# EAGLE board AmbaSat-1 version 2.0 (EAGLE 7.6.0)
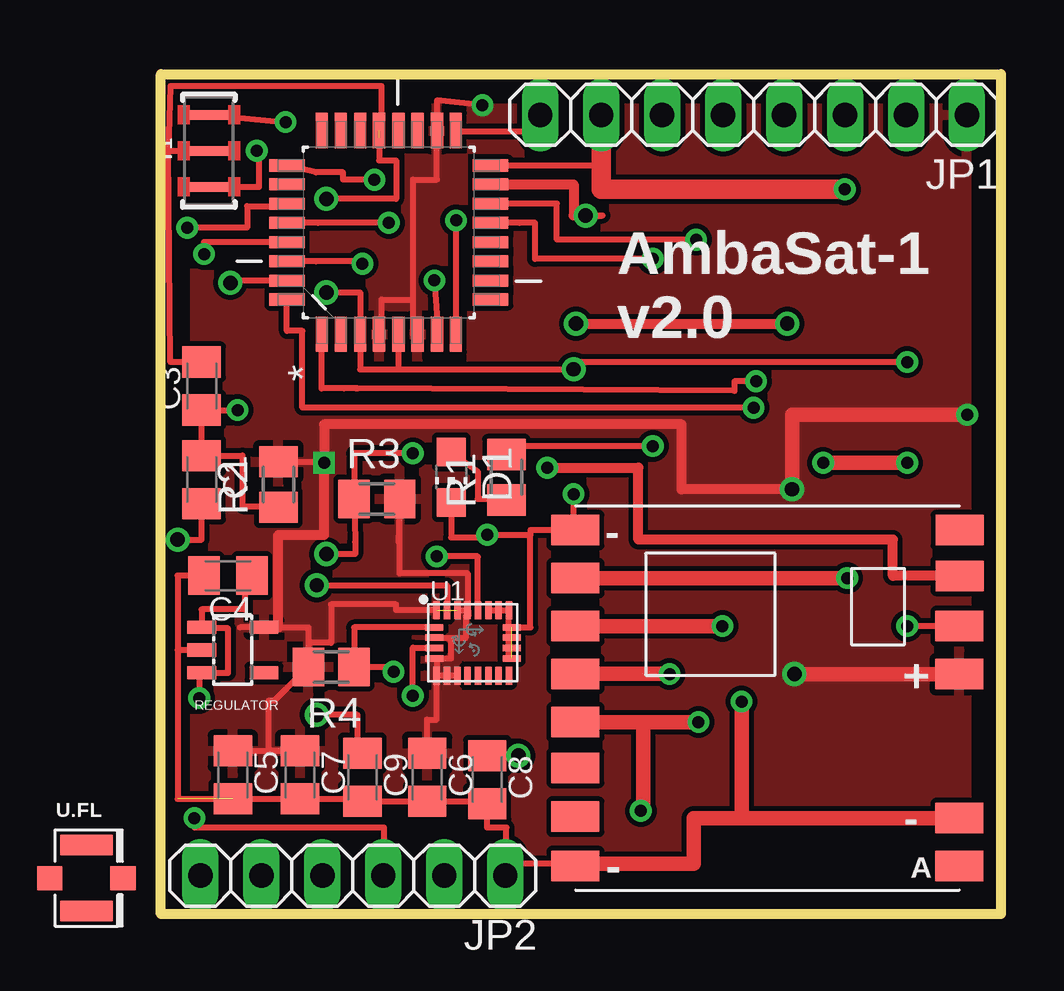
[diagram p0: board, top side]
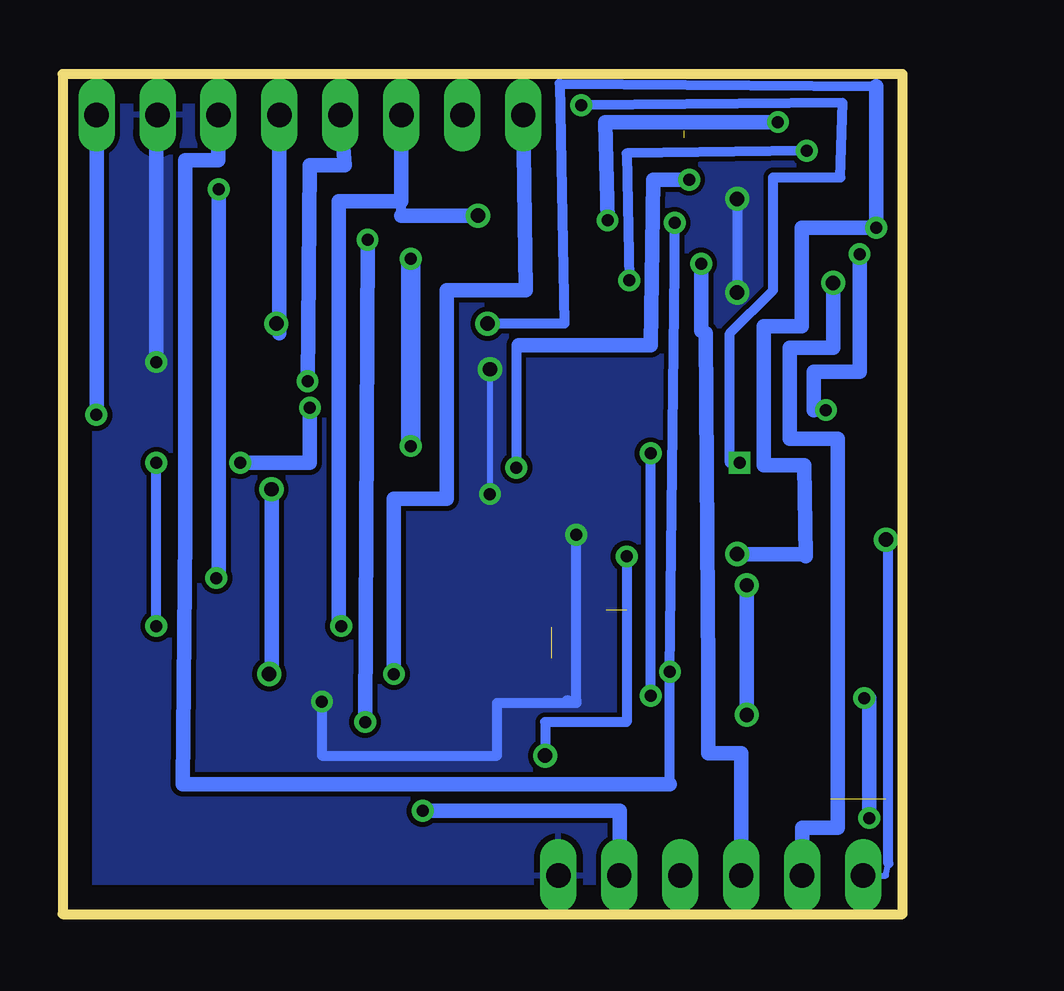
[diagram p1: board, bottom side, seen from below]

Size 35 x 35 mm. Coordinates in mm from the lower left corner, seen from the top.
Outline: 0,0 0,35 35,35 35,0 0,0
Copper layers (1*16): Top 0.035mm / dielectric 1.5mm / Bottom 0.035mm
Design rules "default": minimum track width 10mil, minimum drill 24mil, track to track 8mil, track to pad 8mil, pad to pad 8mil, via to via 8mil, smd to smd 8mil, copper to edge 40mil, drill to drill 8mil, minimum pad ring 10mil, minimum via ring 8mil, stop-mask expansion 4mil, vias tented up to drill 0mil, thermal gap 10mil

## Footprints (pad centres in the part's own frame; a part is rotated, then mirrored left to right if it is on the bottom)
QFP80P900X900X120-32N = smd 1.473 x 0.508: 1 -4.242,2.794; 2 -4.242,2.007; 3 -4.242,1.194; 4 -4.242,0.406; 5 -4.242,-0.406; 6 -4.242,-1.194; 7 -4.242,-2.007; 8 -4.242,-2.794; 17 4.242,-2.794; 18 4.242,-2.007; 19 4.242,-1.194; 20 4.242,-0.406; 21 4.242,0.406; 22 4.242,1.194; 23 4.242,2.007; 24 4.242,2.794 | smd 0.508 x 1.473: 9 -2.794,-4.242; 10 -2.007,-4.242; 11 -1.194,-4.242; 12 -0.406,-4.242; 13 0.406,-4.242; 14 1.194,-4.242; 15 2.007,-4.242; 16 2.794,-4.242; 25 2.794,4.242; 26 2.007,4.242; 27 1.194,4.242; 28 0.406,4.242; 29 -0.406,4.242; 30 -1.194,4.242; 31 -2.007,4.242; 32 -2.794,4.242
C0805K = smd 1.3 x 1.6: 1 -1,0; 2 1,0
CHIP-LED0805 = smd 1.2 x 1.2: A 0,-1.05; C 0,1.05
1X08 = drill 1.016 long: 1 -8.89,0; 2 -6.35,0; 3 -3.81,0; 4 -1.27,0; 5 1.27,0; 6 3.81,0; 7 6.35,0; 8 8.89,0
1X06 = drill 1.016 long: 1 -6.35,0; 2 -3.81,0; 3 -1.27,0; 4 1.27,0; 5 3.81,0; 6 6.35,0
M0805 = smd 1.3 x 1.6: 1 -0.95,0; 2 0.95,0
SOT25 = smd 0.55 x 1.2: 1 -0.95,-1.3; 2 0,-1.3; 3 0.95,-1.3; 4 0.95,1.3; 5 -0.95,1.3
RFM95 = smd 2 x 1.27: ANT 5.777,-7; DIO0 5.777,3; DIO1 5.779,5.095; DIO2 5.779,7; DIO5 -10.225,-4.936; GND 5.777,-5; GND1 -10.223,7; GND2 -10.23,-7; MISO -10.23,5; MOSI -10.225,3; NSS -10.223,-1; RST -10.223,-2.905; SCK -10.23,1.012; VDD 5.777,1
LGA24-8X4 = smd 0.27 x 0.75: 1 -1.505,1.365; 6 -1.505,-1.365; 7 -1.075,-1.365; 8 -0.645,-1.365; 9 -0.215,-1.365; 10 0.215,-1.365; 11 0.645,-1.365; 12 1.075,-1.365; 13 1.505,-1.365; 18 1.505,1.365; 19 1.075,1.365; 20 0.645,1.365; 21 0.215,1.365; 22 -0.215,1.365; 23 -0.645,1.365; 24 -1.075,1.365 | smd 0.75 x 0.27: 2 -1.615,0.645; 3 -1.615,0.215; 4 -1.615,-0.215; 5 -1.615,-0.645; 14 1.615,-0.645; 15 1.615,-0.215; 16 1.615,0.215; 17 1.615,0.645
U.FL = smd 2.2 x 0.85: 1 0,1.375; 2 0,-1.375 | smd 1.05 x 1: FEED 1.525,0; NC -1.525,0
RESONATOR-SMD-4.5X2.0 = smd 0.4 x 1.6: 1 -1.5,0; 2 0,0; 3 1.5,0

## Placement (x,y rotation side)
ATMEGA328P-AU  ATMEGA328P-AU  [QFP80P900X900X120-32N]  9.5,28.4 90 top
C1  1uF  [C0805K]  1.7,18.1 270 top
C3  0.1uF  [C0805K]  1.7,22 90 top
C4  1uF  [C0805K]  2.8,14.1 180 top
C5  2.2uF  [C0805K]  3,5.8 270 top
C6  10uF  [C0805K]  11.1,5.7 270 top
C7  0.1uF  [C0805K]  5.8,5.8 270 top
C8  10nF  [C0805K]  13.6,5.6 270 top
C9  0.1uF  [C0805K]  8.4,5.7 270 top
D1  [CHIP-LED0805]  12.1,18.2 180 top
JP1  [1X08]  24.7,33.3 180 top
JP2  [1X06]  8,1.6 180 top
R1  1k6  [M0805]  14.4,18.2 90 top
R2  10k  [M0805]  4.9,17.9 90 top
R3  1K  [M0805]  9,17.3 0 top
R4  1K  [M0805]  7.1,10.3 180 top
REGULATOR  LP2985AIM5-3.3  [SOT25]  3,11 270 top
RFM95  RFM95  [RFM95]  27.5,9 0 top
U1  LSM9DS1  [LGA24-8X4]  13,11.3 0 top
U.FL  U.FL  [U.FL]  -3.1,1.5 0 top
Y1  4MHz  [RESONATOR-SMD-4.5X2.0]  2,31.8 90 top

## Library data of the parts
ATMEGA328P-AU = Atmel-ATMEGA328P-AU; DESCRIPTION: 8-bit Microcontroller with In-System Programmable Flash; MPN: ATMEGA328P-AU; OC_FARNELL: 1715486; OC_NEWARK: 14R4631; PACKAGE: TQFP-32; SUPPLIER: Atmel
C1 C3-C9 R1-R4 = rcl
D1 = led
JP1 JP2 = pinhead
REGULATOR = LP2985
RFM95 = _c2h
U1 = LSM9DS1; PROD_ID: IC-12536
U.FL = SparkFun-Connectors; PROD_ID: CONN-09193; SF_ID: WRL-09144
Y1 = SparkFun-Clocks; PROD_ID: XTAL-12492

## Nets
A0: ATMEGA328P-AU.23
AREF: ATMEGA328P-AU.20
D3: ATMEGA328P-AU.1 JP1.5
DIO0: ATMEGA328P-AU.32 RFM95.DIO0
DIO1: ATMEGA328P-AU.25 RFM95.DIO1
GND: ATMEGA328P-AU.3 ATMEGA328P-AU.5 ATMEGA328P-AU.21 C3.2 C4.2 C5.2 C6.2 C7.2 C8.2 C9.2 D1.C JP1.2 JP2.1 REGULATOR.2 RFM95.GND RFM95.GND1 RFM95.GND2 U1.14 U1.15 U1.16 U1.17 U1.18 U1.19 U1.20 Y1.2
MISO: ATMEGA328P-AU.16 JP1.7 RFM95.MISO
MOSI: ATMEGA328P-AU.15 JP1.6 RFM95.MOSI
N$1: ATMEGA328P-AU.7 Y1.1
N$2: ATMEGA328P-AU.8 Y1.3
N$3: ATMEGA328P-AU.13 R1.2
N$4: D1.A R1.1
N$5: RFM95.ANT
N$6: C1.2 JP2.6
N$7: C9.1 U1.24
N$8: C8.1 U1.21
N$9: U.FL.2
RESET: ATMEGA328P-AU.29 C1.1 C3.1 R2.1
RX: ATMEGA328P-AU.30 JP2.4
SCK: ATMEGA328P-AU.17 JP1.8 RFM95.SCK
SCL: ATMEGA328P-AU.28 JP1.3 R4.1 U1.2
SDA: ATMEGA328P-AU.27 JP1.4 R3.1 U1.4
SS: ATMEGA328P-AU.14 JP2.2 RFM95.NSS
TX: ATMEGA328P-AU.31 JP2.5
VCC: ATMEGA328P-AU.4 ATMEGA328P-AU.6 ATMEGA328P-AU.18 C5.1 C6.1 C7.1 JP1.1 R2.2 R3.2 R4.2 REGULATOR.5 RFM95.VDD U1.1 U1.3 U1.5 U1.6 U1.7 U1.8 U1.22 U1.23
VIN: C4.1 JP2.3 REGULATOR.1 REGULATOR.3

## Tracks (layer width: path | path; a pad name or v marks a point on that pad's centre or on a via)
D3  (via drill 0.5)
  Top 0.254: 8.21,21.9 7.64,21.9 | v24.8,22.2 23.9,22.2 23.9,21.8 8.14,21.9 7.64,21.9 | 7.64,21.9 6.71,21.9 ATMEGA328P-AU.1
  Bottom 0.254: JP1.5 23.44,33.4
  Bottom 0.61: v24.8,22.2 24.7,31.2 23.24,31.2 23.44,33.4
DIO0  (via drill 0.5)
  Top 0.254: RFM95.DIO0 v31.1,12 | v24.7,21.1 5.9,21.1 5.9,24.3 5.26,24.3 ATMEGA328P-AU.32
  Top 0.61: v31.1,18.8 v27.6,18.8
  Bottom 0.406: v31.1,12 v31.1,18.8
  Bottom 0.61: v27.6,18.8 24.7,18.8 v24.7,21.1
DIO1  (via drill 0.5)
  Top 0.254: v8.9,30.6 7.6,30.6 7.6,30.9 6.46,30.9 ATMEGA328P-AU.25
  Top 0.406: RFM95.DIO1 30.5,14.1 30.5,15.6 19.9,15.6 19.9,18.6 v16.1,18.6
  Bottom 0.406: 16,23.7 16.1,23.7 v16.1,18.6
  Bottom 0.61: v8.9,30.6 10.4,30.6 10.5,23.7 16,23.7
GND  (via drill 0.5, 0.6)  (5 unrouted)
  Top 0.254: REGULATOR.2 0.7,11 | 0.7,11 0.7,4.8 C7.2 8.4,4.8 C9.2 C6.2 13.6,4.7 C8.2 13.6,3.6 14.4,3.6 14.4,2.1 | C4.2 0.7,14.1 0.7,11 | C3.2 0.4,23 0.3,31.8 | 0.3,31.8 Y1.2 | 0.3,31.8 0.4,34.5 9.2,34.5 9.2,32.34 9.1,32.34 9.1,31.4 9.8,31.4 9.8,29.8 v6.9,29.8 | RFM95.GND2 17.27,2.1 14.4,2.1 | v6.9,25.9 8.31,25.9 ATMEGA328P-AU.3 8.3,22.7 9.9,22.7 | JP2.1 14.35,2.1 14.4,2.1 | U1.20 U1.19 U1.18 14.51,10.65 U1.14 | RFM95.GND1 17.3,16 | 9.9,22.7 9.91,22.7 | 9.91,22.7 ATMEGA328P-AU.5 9.9,22.7 | 9.91,22.7 v17.2,22.7 17.2,23 v31.1,23 | 15.4,15.8 v13.6,15.8 13.6,15.7 12.1,15.7 D1.C | U1.17 15.4,11.95 15.4,15.8 | RFM95.GND1 15.4,16 15.4,15.8 | RFM95.GND1 17.2,16 v17.2,17.5
  Top 0.61: RFM95.GND 24.2,4 | 24.2,4 22.2,4 22.2,2.1 17.27,2.1 | v24.2,8.86 24.2,4
  Bottom 0.254: v17.2,22.7 v17.2,17.5 | JP1.2 31.1,33.3 | 14,8.86 14,8.9 13.6,8.9
  Bottom 0.406: v6.9,29.8 v6.9,25.9 | 13.6,8.9 v13.6,15.8 | v24.2,8.86 24.2,6.6 16.9,6.6 16.9,8.8 13.6,8.8 14,8.9
  Bottom 0.61: 31.1,33.3 v31.1,23
  pour Bottom: 0,35 35.2,35 35.2,0 0,0
MISO  (via drill 0.5)
  Top 0.254: ATMEGA328P-AU.16 18.35,31.19
  Top 0.61: RFM95.MISO v28.6,14
  Top 0.813: v28.5,30.2 18.35,30.2 18.35,31.19 JP1.7
  Bottom 0.254: v28.6,14 28.5,14
  Bottom 0.61: 28.5,14 v28.5,30.2
MOSI  (via drill 0.5, 0.6)
  Top 0.254: 15.1,30.41 15.1,30.4 | 17.2,29.1 18.4,29.11 v17.7,29.1
  Top 0.406: ATMEGA328P-AU.15 15.1,30.41 | 15.1,30.4 17.2,30.4 17.2,29.1
  Top 0.61: RFM95.MOSI v23.4,12
  Bottom 0.254: v23.4,12 23.5,12
  Bottom 0.406: 20.89,29.1 20.89,29.7
  Bottom 0.61: 23.5,12 23.5,29.7 20.89,29.7 JP1.6 | v17.7,29.1 20.89,29.1
N$1  (via drill 0.5)
  Top 0.254: Y1.1 4.1,30.3 4.1,31.8 v4,31.8 | v11.4,26.4 11.5,25.01 ATMEGA328P-AU.7
  Bottom 0.406: v4,31.8 11.5,31.7 v11.4,26.4
N$2  (via drill 0.5)
  Top 0.254: Y1.3 v5.2,33 | v12.3,28.9 12.29,28.6 ATMEGA328P-AU.8
  Bottom 0.61: v5.2,33 12.4,33 v12.3,28.9
N$3  (via drill 0.5)
  Top 0.254: v20.5,27.3 15.6,27.3 15.6,28.8 14.94,28.8 ATMEGA328P-AU.13 | v20.5,19.5 14.3,19.5 14.3,18.9 14.4,18.9 R1.2
  Bottom 0.813: v20.5,27.3 v20.5,19.5
N$4
  Top 0.254: D1.A 13.2,18.45 13.2,17.3 14.4,17.3 R1.1
N$6  (via drill 0.6)
  Top 0.254: v0.7,15.6 1.7,15.6 C1.2
  Bottom 0.254: 0.6,15.7 v0.7,15.6 | JP2.6 0.7,1.6 0.6,2.1
  Bottom 0.406: 0.6,2.1 0.6,15.7
N$7  (via drill 0.6)
  Top 0.254: C9.1 8.2,6.7 8.2,8.3 v6.5,8.3 | v6.5,13.7 11.93,13.7 U1.24
  Bottom 0.61: v6.5,8.3 v6.5,13.7
N$8  (via drill 0.5, 0.6)
  Top 0.254: v14.9,6.6 C8.1 | U1.21 13.21,14.88 13.2,14.9 v11.5,14.9
  Bottom 0.406: v14.9,6.6 14.9,8 13.3,8 11.5,8 v11.5,14.9
RESET  (via drill 0.5)
  Top 0.254: R2.1 4.9,17 3.4,17 3.4,19.1 C1.1 C3.1 v3.2,21 | v1.8,27.5 1.8,27.99 ATMEGA328P-AU.29
  Bottom 0.406: v3.2,21 3.7,21
  Bottom 0.61: 3.7,21 3.7,22.6 1.8,22.6 v1.8,27.5
RX  (via drill 0.5)
  Top 0.254: v8.4,27.1 8.4,27.2 6.46,27.2 ATMEGA328P-AU.30
  Bottom 0.254: 8.2,24.2 8.4,24.3
  Bottom 0.61: 8.2,24.2 8.1,10.1 8.1,6.7 6.73,6.7 JP2.4 | 8.4,24.3 v8.4,27.1
SCK  (via drill 0.5)
  Top 0.254: 21.2,10.01 v21.2,10 | JP1.8 15.9,32.6 12.29,32.6 ATMEGA328P-AU.17
  Top 0.61: RFM95.SCK 21.2,10.01
  Bottom 0.61: v21.2,10 21.2,17.3 19,17.3 19,26 15.71,26 JP1.8
SCL  (via drill 0.5)
  Top 0.254: v9.5,28.8 6.56,28.8 ATMEGA328P-AU.28 | 9.7,10.14 v9.7,10.1 9.7,10.3 R4.1 8.05,11.95 U1.2
  Bottom 0.254: 29.9,30.1 29.92,30.12 29.9,30.12 | 29.9,15.9 29.9,15.8
  Bottom 0.406: v9.5,28.8 9.5,26.9 v9.7,10.1 9.7,5.4
  Bottom 0.61: 29.9,30.1 29.9,15.9 | 29.9,15.8 30,5.4 9.7,5.4 | 29.9,30.12 29.9,31.4 28.51,31.4 JP1.3
SDA  (via drill 0.5, 0.6)
  Top 0.254: v1.1,28.6 3.6,28.6 3.6,29.5 5.26,29.5 ATMEGA328P-AU.27 | v6.9,15 8.1,15 8.1,15.5 R3.1 8.05,19.2 v10.5,19.2 | v10.5,9.1 10.5,11.1 U1.4
  Top 0.406: v17.3,24.6 v26.1,24.6
  Bottom 0.254: 17.4,24.6 v17.3,24.6 | 26.08,24.6 v26.1,24.6 25.97,24.2 | 4.04,15 4.04,14.91
  Bottom 0.406: 1.1,34.5 14.3,34.6 14.1,24.6 v17.3,24.6 | v10.5,9.1 v10.5,19.2
  Bottom 0.61: 1.1,34.5 v1.1,28.6 4.2,28.6 4.2,24.5 5.8,24.5 5.8,18.7 4.1,18.7 4.04,14.91 | 25.97,24.2 JP1.4 | v6.9,15 4.04,15
SS  (via drill 0.5)
  Top 0.254: v22.3,28.1 16.5,28.1 16.5,29.6 14.84,29.6 ATMEGA328P-AU.14 | v20,4.3 20.1,4.3
  Top 0.61: RFM95.NSS 20.1,8 | 20.1,8 v22.4,8 | 20.1,4.3 20.1,8
  Bottom 0.254: JP2.2
  Bottom 0.61: v22.4,8 v22.3,28.1 | JP2.2 11.8,4.3 v20,4.3
TX  (via drill 0.6)
  Top 0.254: v2.9,26.3 2.7,26.39 ATMEGA328P-AU.31
  Bottom 0.254: 4.2,3.5 4.19,3.6
  Bottom 0.61: v2.9,26.3 2.9,23.6 4.7,23.6 4.7,19.8 2.7,19.8 2.7,3.6 4.19,3.6 JP2.5
VCC  (via drill 0.5, 0.6)  (1 unrouted)
  Top 0.254: 3.3,11.95 REGULATOR.5 4.9,11.95 6.15,11.95 6.15,11.3 | 10.5,25.6 10.5,30.6 11.51,30.6 ATMEGA328P-AU.18 11.51,33.9 v13.4,33.7 | 10.5,25.6 10.5,24.16 ATMEGA328P-AU.6 | R2.2 6.8,18.85 v6.8,18.8 6.8,18.7 | ATMEGA328P-AU.4 9.2,24.16 9.2,25.6 10.5,25.6 | U1.23 U1.22 | C6.1 11.1,8.1 11.49,8.1 U1.6 | 9.9,15.5 R3.2 9.95,14.2 12.79,14.2 U1.22 | C5.1 C7.1 4.5,6.8 4.5,8.9 4.75,8.9 R4.2 6.15,11.3 | U1.6 11.49,10.65 U1.5 12.1,10.65 12.1,11.5 | U1.8 U1.7 U1.6 | 12.1,11.5 11.38,11.5 U1.3 | U1.22 12.8,12.4 12.7,12.4 12.7,11.5 12.1,11.5 | U1.1 9.8,12.66 9.8,12.9 7.1,12.9 7.1,11.3 6.15,11.3
  Top 0.406: 4.9,11.95 4.9,15.8 6.8,15.8 v6.8,18.8 6.8,20.4 21.7,20.4 21.7,17.7 v26.3,17.7
  Top 0.61: v33.6,20.8 26.3,20.8 v26.3,17.7 | RFM95.VDD v26.4,10
  Bottom 0.254: v6.8,18.8 7.2,18.8 | v26.4,10 26.3,10 | v33.6,20.8 v33.59,20.8
  Bottom 0.406: 7.2,18.8 7.2,24.2 5.4,26 5.4,30.7 2.6,30.7 2.5,33.8 v13.4,33.7
  Bottom 0.61: 26.3,10 v26.3,17.7 | v33.59,20.8 JP1.1
  pour Top: 0,35 35,35.1 35,0.1 0,0
VIN  (via drill 0.5)
  Top 0.254: REGULATOR.1 1.7,11.9 2.8,11.9 2.8,10.05 REGULATOR.3 1.6,10.05 v1.6,9 | REGULATOR.1 1.8,11.95 | C4.1 3.5,14.1 3.5,12.7 1.7,12.7 REGULATOR.1 | JP2.3 9.3,1.6 9.3,3.6 1.4,3.6 v1.4,4
  Bottom 0.254: v1.4,4 1.5,4 | v1.6,9 1.4,9
  Bottom 0.61: 1.4,9 v1.4,4

## Text on the board
tPlace: AmbaSat-1 / v2.0